# Altium PCB Dashboard.PcbDoc
Units mil, origin at the board's own origin, x right, y up, seen from the top; angles counter-clockwise.
Board outline 6291 x 3582 mil, 2 copper layers (Top Layer, Bottom Layer); 111 components, 163 nets, 496 pads, 0 vias.
Unrouted connection lines stored in the file: 231.
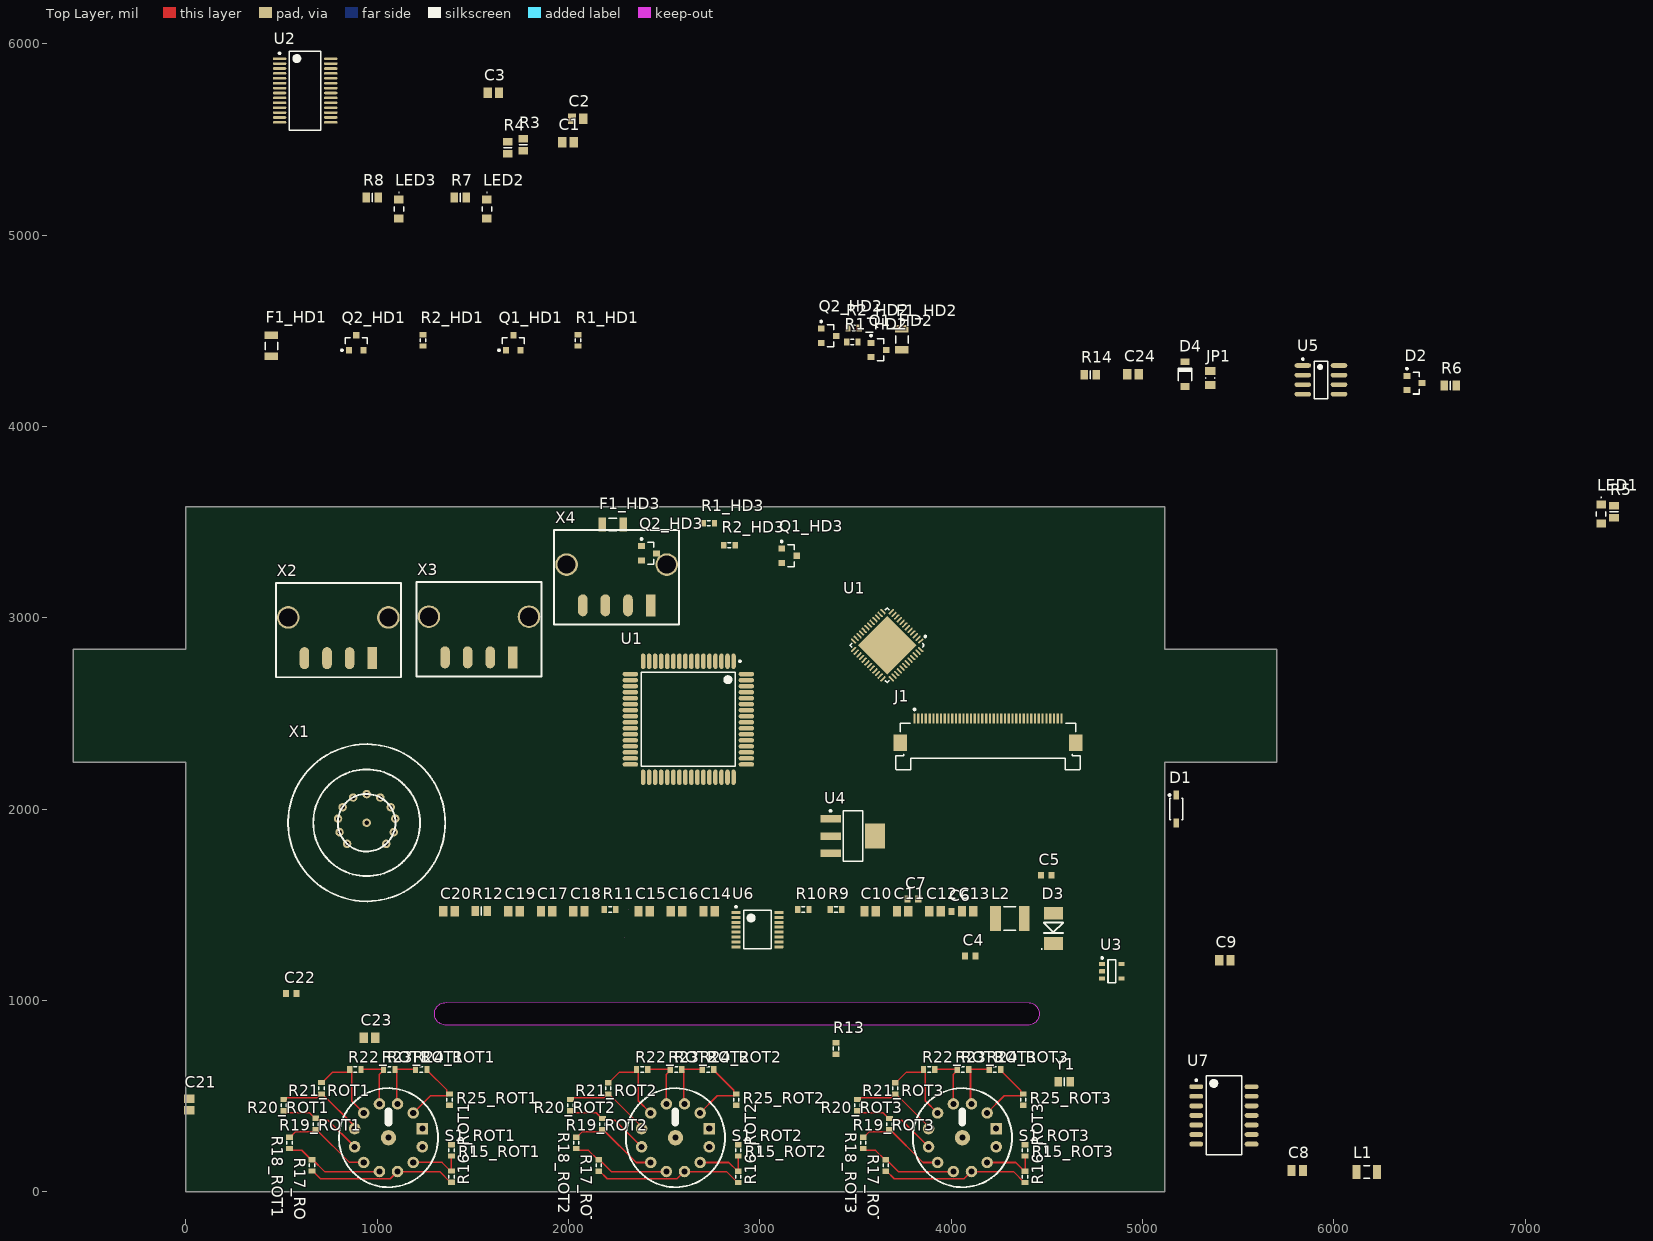
[diagram p0: Top Layer view]
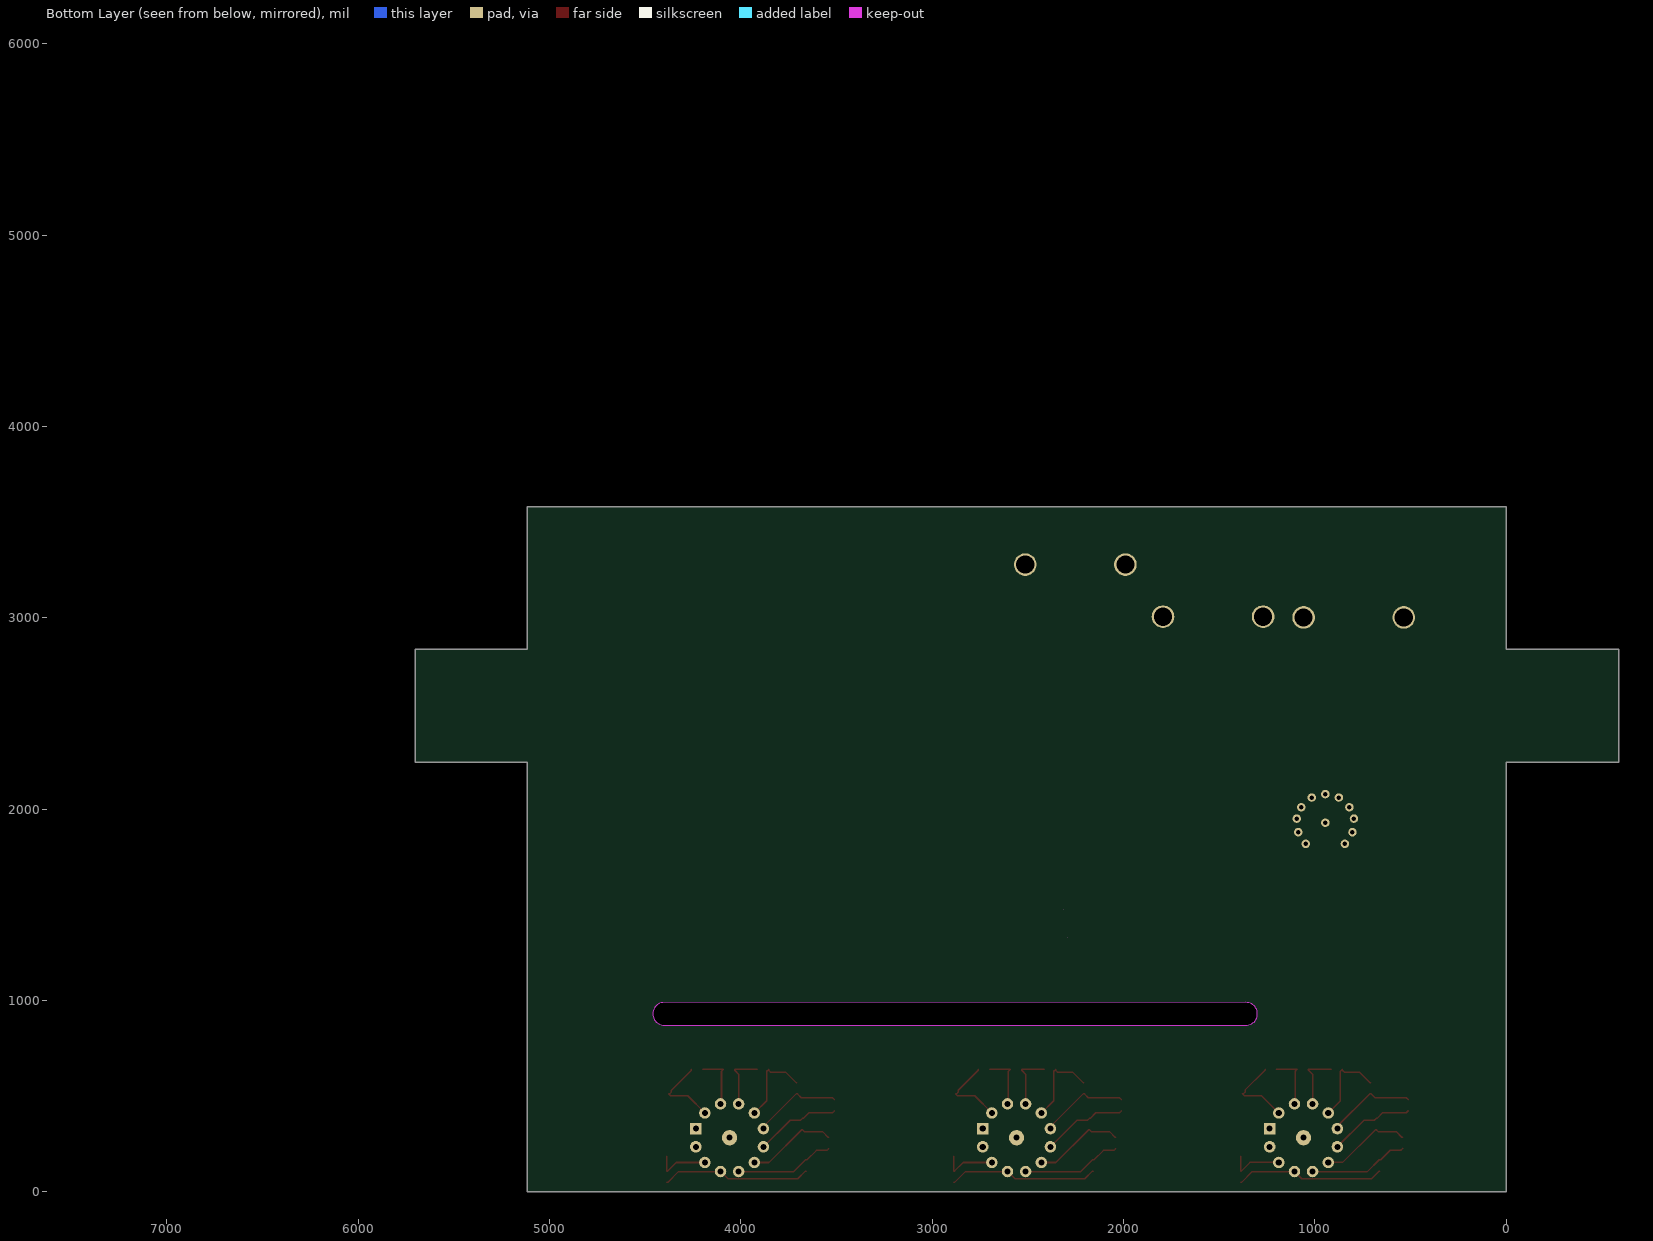
[diagram p1: Bottom Layer view, seen from below]

## Layer stack, top to bottom
Top Solder: solder mask 0.4, Solder Resist, Dk 3.5
Top Layer: signal copper 1.4
Dielectric 1: dielectric 12.6, FR-4, Dk 4.8
Bottom Layer: signal copper 1.4
Bottom Solder: solder mask 0.4, Solder Resist, Dk 3.5

## Board outline
0,0 0,2244.1 -590,2244.09 -590,2835 0,2835 0,3582 5118,3582 5118,2835 5701,2835 5701,2244.09 5118,2244.09 5118,0
cut-out: 1360,990 cw(c4400,930) 4460,930 cw(c4400,930) 4400,870 1360,870 cw(c1360,930) 1300,930 cw(c1360,930)
cut-out: 2312.99,1474.41
cut-out: 2291.34,1328.74

## Design rules (kind name [scope] priority, off if disabled: settings)
Clearance [All] p1: gap=4 ignorepadtopadclearanceinfootprint=FALSE except(0: Arc-Hole Track-Hole SMDPad-Hole THPad-Hole Via-Hole Fill-Hole Poly-Hole Region-Hole Text-Hole)
DiffPairsRouting [All] p1: maxlimit=10 minlimit=10 mostfreqgap=10 toplayer_minwidth=15 toplayer_maxwidth=15 toplayer_prefwidth=15 bottomlayer_minwidth=15 bottomlayer_maxwidth=15 bottomlayer_prefwidth=15 maxuncoupledlength=500
MatchedLengths "Schematic Matched Net Lengths" [InNet('CAN0.CAN_P')] p1: tolerance=1000 checknetsindiffpair=TRUE checkdiffpairvsdiffpair=FALSE checkxsignals=FALSE checkothers=FALSE
PolygonConnect [All] p1: connectstyle=Relief reliefconductorwidth=10 reliefentries=4 polygonreliefangle="90 Angle" airgapwidth=10
RoomDefinition ROT3 [InComponentClass('ROT3')] p1: confinementstyle=ConfineIn formatcopy=TRUE lockcomponents=FALSE outline 3471.46,-0.2 4426.18,-0.2 4426.18,678.94 3471.46,678.94
RoomDefinition ROT2 [InComponentClass('ROT2')] p2: confinementstyle=ConfineIn formatcopy=TRUE lockcomponents=FALSE outline 1971.46,-0.2 2926.18,-0.2 2926.18,678.94 1971.46,678.94
RoomDefinition ROT1 [InComponentClass('ROT1')] p3: confinementstyle=ConfineIn formatcopy=TRUE lockcomponents=FALSE outline 472.44,0 1427.17,0 1427.17,679.13 472.44,679.13
RoomDefinition "Boost Converter" [InComponentClass('Boost Converter')] p4: confinementstyle=ConfineIn formatcopy=TRUE lockcomponents=FALSE outline 1312.52,1250.35 4800.88,1250.35 4800.88,1604.7 1312.52,1604.7
RoomDefinition AT90 [InComponentClass('AT90')] p5: confinementstyle=ConfineIn formatcopy=TRUE lockcomponents=FALSE outline 5746.39,56.15 6259.21,56.15 6259.21,1093.61 5746.39,1093.61
RoomDefinition ResetCkt [InComponentClass('ResetCkt')] p6: confinementstyle=ConfineIn formatcopy=TRUE lockcomponents=FALSE outline 4597.79,4076.72 5437.35,4076.72 5437.35,4520.61 4597.79,4520.61
RoomDefinition PowerLed [InComponentClass('PowerLed')] p7: confinementstyle=ConfineIn formatcopy=TRUE lockcomponents=FALSE outline 7028.54,3054.13 7909.45,3054.13 7909.45,4054.13 7028.54,4054.13
RoomDefinition CAN [InComponentClass('CAN')] p8: confinementstyle=ConfineIn formatcopy=TRUE lockcomponents=FALSE outline 5688.93,3842.92 6706.64,3842.92 6706.64,4521.07 5688.93,4521.07
RoomDefinition Int [InComponentClass('Int')] p9: confinementstyle=ConfineIn formatcopy=TRUE lockcomponents=FALSE outline 303.15,4937.01 2226.93,4937.01 2226.93,6116.46 303.15,6116.46
RoomDefinition HD2 [InComponentClass('HD2')] p10: confinementstyle=ConfineIn formatcopy=TRUE lockcomponents=FALSE outline 2668.23,3676.18 4228.35,3676.18 4228.35,4676.18 2668.23,4676.18
RoomDefinition HD1 [InComponentClass('HD1')] p11: confinementstyle=ConfineIn formatcopy=TRUE lockcomponents=FALSE outline 160.43,3626.97 2160.43,3626.97 2160.43,4626.97 160.43,4626.97
RoomDefinition HD3 [InComponentClass('HD3')] p12: confinementstyle=ConfineIn formatcopy=TRUE lockcomponents=FALSE outline 1898.54,2648.62 3458.66,2648.62 3458.66,3648.62 1898.54,3648.62
RoutingVias [All] p1: holewidth=28 width=50 viastyle="Through Hole" minholewidth=28 minwidth=50 maxholewidth=28 maxwidth=50
SolderMaskExpansion [All] p1: expansion=4
Width [All] p1: maxlimit=10 minlimit=6 preferedwidth=8 minimp=50.000000 maximp=50.000000 favimp=50.000000
29 further rules are at their usual default settings.

## Classes and differential pairs
net class POS[1..3]: POS1 POS2 POS3
channel class Rotary_Pot: ROT1 ROT2 ROT3
component class ROT3: R15_ROT3 R16_ROT3 R17_ROT3 R18_ROT3 R19_ROT3 R20_ROT3 R21_ROT3 R22_ROT3 R23_ROT3 R24_ROT3 R25_ROT3 S1_ROT3
component class ROT2: R15_ROT2 R16_ROT2 R17_ROT2 R18_ROT2 R19_ROT2 R20_ROT2 R21_ROT2 R22_ROT2 R23_ROT2 R24_ROT2 R25_ROT2 S1_ROT2
component class ROT1: R15_ROT1 R16_ROT1 R17_ROT1 R18_ROT1 R19_ROT1 R20_ROT1 R21_ROT1 R22_ROT1 R23_ROT1 R24_ROT1 R25_ROT1 S1_ROT1
net class DRV[1..3]: DRV1 DRV2 DRV3
net class PWM[1..3]: PWM1 PWM2 PWM3
component class ResetCkt: C24 D4 JP1 R14
component class "Boost Converter": C10 C11 C12 C13 C14 C15 C16 C17 C18 C19 C20 D3 L2 R9 R10 R11 R12 U6
component class AT90: C8 C9 L1 U1 Y1
component class PowerLed: LED1 R5
component class CAN: D2 R6 U5
component class LCD: C21 C22 C23 J1 R13 U1 U7
component class Int: C1 C2 C3 LED2 LED3 R3 R4 R7 R8 U2
component class Dashboard: C4 C5 C6 C7 C? D1 D? U1 U3 U4 U? X1 X2 X3 X4 X?
component class HD1: F1_HD1 F1_HD13 Q1_HD1 Q1_HD13 Q2_HD1 Q2_HD13 R1_HD1 R1_HD13 R2_HD1 R2_HD13
channel class HighSideDriver: HD2 HD3
component class HD3: F1_HD3 Q1_HD3 Q2_HD3 R1_HD3 R2_HD3
component class HD2: F1_HD2 Q1_HD2 Q2_HD2 R1_HD2 R2_HD2
differential pair CAN0.CAN: +CAN0.CAN_P -CAN0.CAN_N

## Components (designator, comment, footprint, x,y, rotation, side; value= is the part's Value field where it differs from the comment)
C1 "Cap" C0805 1997.36,5485.07 r0 top value=0.1uF
C2 "Cap" C0805 2047.68,5608.27 r0 top value=0.1uF
C3 "Cap" C0805 1607.6,5744.91 r0 top value=0.1uF
C4 "Cap" 1608[0603] 4100.13,1232.12 r0 top value=1uF
C5 "Cap" 1608[0603] 4497.36,1654.36 r0 top value=1uF
C6 "Cap" 1608[0603] 4030.72,1465.82 r0 top value=10uF
C7 "Cap" 1608[0603] 3800.72,1530.82 r0 top value=10uF
C8 "Cap" C0805 5809.39,111.27 r0 top value=18pf
C9 "Cap" C0805 5431.1,1210.63 r0 top value=18pf
C10 "Cap" C0805 3576.41,1465.91 r0 top
C11 "Cap" C0805 3746.69,1465.91 r0 top
C12 "Cap" C0805 3915.99,1465.91 r0 top
C13 "Cap" C0805 4086.27,1465.91 r0 top
C14 "Cap" C0805 2734.83,1465.91 r0 top
C15 "Cap" C0805 2395.25,1465.91 r0 top
C16 "Cap" C0805 2564.55,1465.91 r0 top
C17 "Cap" C0805 1885.38,1465.91 r0 top
C18 "Cap" C0805 2054.68,1465.91 r0 top
C19 "Cap" C0805 1715.1,1465.91 r0 top
C20 "Cap" C0805 1375.51,1465.91 r0 top
C21 "Cap" C0805 16.84,456.35 r90 top value=4.7uF
C22 "Cap" 1608[0603] 551.84,1036.35 r0 top value=10uF
C23 "Cap" C0805 959.65,805.12 r0 top value=100nF
C24 "Cap" C0805 4950.79,4273.69 r0 top value=0.1uF
D1 "1N5819HW-7-F" DIOD-SOD-123-2_V 5177.17,2001.05 r90 top
D2 "NUP2105LT1" ONSC-SOT-23-3-318-08_V 6422.2,4227.77 r0 top
D3 "Schottky Diode" DIOM4326X24N 4535.11,1377.32 r90 top
D4 "1N4148W-TP" MCC-SOD123_V 5223.43,4274.15 r90 top
F1_HD1 "1206L016WR" LFUS-1206L016WR_V 446.58,4421.66 r90 top (schematic designator F1)
F1_HD2 "1206L016WR" LFUS-1206L016WR_V 3743.11,4455.71 r270 top (schematic designator F1)
F1_HD3 "1206L016WR" LFUS-1206L016WR_V 2231.3,3488.19 r0 top (schematic designator F1)
J1 "FH12A-40S-0.5SH(55)" HIRO-FH12A-40S-0.5SH(55)_V 4192.91,2410.43 r0 top
JP1 "Jumper 0805(2012)" RESC0805(2012)_N 5353.43,4254.15 r90 top value="0.00 Ohm"
L1 "10uH" INDC3216 6172.59,103.4 r0 top
L2 "Inductor" INDC4532 4306.76,1428.51 r0 top value=15uH
LED1 "LTST-C171AKT" LTST-C171AKT_V 7397.8,3542.98 r90 top
LED2 "LTST-C171AKT" LTST-C171AKT_V 1573.39,5137.24 r90 top
LED3 "LTST-C171AKT" LTST-C171AKT_V 1113.39,5137.24 r90 top
Q1_HD1 "MMBT4403LT1G" ONSC-SOT-23-3-318-08_V 1711.4,4438.39 r90 top (schematic designator Q1)
Q1_HD2 "MMBT4403LT1G" ONSC-SOT-23-3-318-08_V 3621.06,4400.59 r0 top (schematic designator Q1)
Q1_HD3 "MMBT4403LT1G" ONSC-SOT-23-3-318-08_V 3153.54,3324.8 r0 top (schematic designator Q1)
Q2_HD1 "MMBT4401M3T5G" ONSC-SOT-23-3-318-08_V 890.5,4438.39 r90 top (schematic designator Q2)
Q2_HD2 "MMBT4401M3T5G" ONSC-SOT-23-3-318-08_V 3360.24,4474.41 r0 top (schematic designator Q2)
Q2_HD3 "MMBT4401M3T5G" ONSC-SOT-23-3-318-08_V 2421.26,3337.6 r0 top (schematic designator Q2)
R1_HD1 "Res1" J1-0603 2050,4451.19 r90 top value=1K (schematic designator R1)
R1_HD2 "Res1" J1-0603 3484.25,4441.93 r0 top value=1K (schematic designator R1)
R1_HD3 "Res1" J1-0603 2733.27,3494.09 r0 top value=1K (schematic designator R1)
R2_HD1 "Res1" J1-0603 1239.92,4451.19 r90 top value=1K (schematic designator R2)
R2_HD2 "Res1" J1-0603 3490.16,4515.75 r180 top value=1K (schematic designator R2)
R2_HD3 "Res1" J1-0603 2841.54,3379.92 r0 top value=1K (schematic designator R2)
R3 "Res1" 6-0805_L 1763.15,5473.27 r90 top value=1K
R4 "Res1" 6-0805_L 1682.68,5458.27 r90 top value=1K
R5 "Res1" 6-0805_L 7465.55,3555.12 r90 top value=1k
R6 "Res1" 6-0805_L 6609.2,4213.99 r0 top value=100k
R7 "Res1" 6-0805_L 1433.39,5197.24 r0 top value=1k
R8 "Res1" 6-0805_L 973.39,5197.24 r0 top value=1k
R9 "Res3" J1-0603 3398.25,1475.75 r0 top value=10
R10 "Res3" J1-0603 3227.96,1475.75 r0 top value=182K
R11 "Res3" J1-0603 2217.09,1475.75 r0 top value=10K
R12 "Res3" 6-0805_L 1544.81,1467.88 r0 top value=12.7k
R13 "Res3" J1-0603 3397.64,749.02 r90 top value=47k
R14 "Res1" 6-0805_L 4727.71,4270.61 r0 top value=1K
R15_ROT1 "Res3" J1-0603 1387.8,216.54 r270 top value=1K (schematic designator R15)
R15_ROT2 "Res3" J1-0603 2886.81,216.34 r270 top value=1K (schematic designator R15)
R15_ROT3 "Res3" J1-0603 4386.81,216.34 r270 top value=1K (schematic designator R15)
R16_ROT1 "Res3" J1-0603 1387.8,78.74 r90 top value=1K (schematic designator R16)
R16_ROT2 "Res3" J1-0603 2886.81,78.54 r90 top value=1K (schematic designator R16)
R16_ROT3 "Res3" J1-0603 4386.81,78.54 r90 top value=1K (schematic designator R16)
R17_ROT1 "Res3" J1-0603 659.45,137.8 r90 top value=1K (schematic designator R17)
R17_ROT2 "Res3" J1-0603 2158.46,137.6 r90 top value=1K (schematic designator R17)
R17_ROT3 "Res3" J1-0603 3658.46,137.6 r90 top value=1K (schematic designator R17)
R18_ROT1 "Res3" J1-0603 541.34,255.91 r270 top value=1K (schematic designator R18)
R18_ROT2 "Res3" J1-0603 2040.35,255.71 r270 top value=1K (schematic designator R18)
R18_ROT3 "Res3" J1-0603 3540.35,255.71 r270 top value=1K (schematic designator R18)
R19_ROT1 "Res3" J1-0603 679.13,354.33 r90 top value=1K (schematic designator R19)
R19_ROT2 "Res3" J1-0603 2178.15,354.13 r90 top value=1K (schematic designator R19)
R19_ROT3 "Res3" J1-0603 3678.15,354.13 r90 top value=1K (schematic designator R19)
R20_ROT1 "Res3" J1-0603 511.81,452.76 r270 top value=1K (schematic designator R20)
R20_ROT2 "Res3" J1-0603 2010.83,452.56 r270 top value=1K (schematic designator R20)
R20_ROT3 "Res3" J1-0603 3510.83,452.56 r270 top value=1K (schematic designator R20)
R21_ROT1 "Res3" J1-0603 708.66,541.34 r90 top value=1K (schematic designator R21)
R21_ROT2 "Res3" J1-0603 2207.68,541.14 r90 top value=1K (schematic designator R21)
R21_ROT3 "Res3" J1-0603 3707.68,541.14 r90 top value=1K (schematic designator R21)
R22_ROT1 "Res3" J1-0603 885.83,639.76 r180 top value=1K (schematic designator R22)
R22_ROT2 "Res3" J1-0603 2384.84,639.57 r180 top value=1K (schematic designator R22)
R22_ROT3 "Res3" J1-0603 3884.84,639.57 r180 top value=1K (schematic designator R22)
R23_ROT1 "Res3" J1-0603 1062.99,639.76 r0 top value=1K (schematic designator R23)
R23_ROT2 "Res3" J1-0603 2562.01,639.57 r0 top value=1K (schematic designator R23)
R23_ROT3 "Res3" J1-0603 4062.01,639.57 r0 top value=1K (schematic designator R23)
R24_ROT1 "Res3" J1-0603 1230.32,639.76 r180 top value=1K (schematic designator R24)
R24_ROT2 "Res3" J1-0603 2729.33,639.57 r180 top value=1K (schematic designator R24)
R24_ROT3 "Res3" J1-0603 4229.33,639.57 r180 top value=1K (schematic designator R24)
R25_ROT1 "Res3" J1-0603 1377.95,482.28 r270 top value=1K (schematic designator R25)
R25_ROT2 "Res3" J1-0603 2876.97,482.09 r270 top value=1K (schematic designator R25)
R25_ROT3 "Res3" J1-0603 4376.97,482.09 r270 top value=1K (schematic designator R25)
S1_ROT1 "Rotary" Rotary 1059.06,282.68 r0 top (schematic designator S1)
S1_ROT2 "Rotary" Rotary 2559.05,282.68 r0 top (schematic designator S1)
S1_ROT3 "Rotary" Rotary 4059.05,282.68 r0 top (schematic designator S1)
U1 "FT801Q-R" WQFN-48 3665.69,2856.89 r225 top
U1 "AT90CAN128-16AU" 64A_M 2626.44,2470.03 r270 top
U2 "FT232RL-Reel" SSOP-28_L 623.39,5756.46 r0 top
U3 "LP5907MFX-3.3/NOPB" DBV0005A_L 4839.8,1152.6 r0 top
U4 "LM1117IMPX-5.0/NOPB" MP04A_M 3486.14,1859.45 r0 top
U5 "MCP2551-I/SN" SOIC-SN8_N 5933.07,4244.29 r0 top
U6 "LM5000-3MTC/NOPB" PW0016A_L 2987.8,1370.43 r0 top
U7 "74LCS125M" SOIC127P780X210-14M 5426.06,399.29 r0 top
X1 "EN3P12MX" EN3P12MX 944.88,1929.13 r0 top
X2 "043650-0409" 043650-0409 795,3002 r0 top
X3 "043650-0409" 043650-0409 1530,3006 r0 top
X4 "043650-0409" 043650-0409 2250,3278 r0 top
Y1 "XTAL" 6-0805_L 4591.85,575.62 r0 top

## Footprints (in the part's own frame and the unit in brackets; to place one, negate y for a bottom-side part, rotate by r counter-clockwise, add the part's x,y. Pads: shape width x height; smd on the part's side, far side on the other; paste and mask are expansions set on the pad)
6-0805_L [mm] "Chip Resistor, Body 2.0x1.2mm, IPC High Density"
  rect 1x1.3 smd: 1(-0.8,0) 2(0.8,0)
  silkscreen extent 0,-0.55 0,0.55, body extent -1.07,-0.7 1.07,0.7, height 0.7
64A_M [mm] "Thin QFP, 64-Leads, Body 14x14mm, Pitch 0.8mm, IPC Low Density"
  oval 2.05x0.6 smd: 1(-7.7,6) 2(-7.7,5.2) 3(-7.7,4.4) 4(-7.7,3.6) 5(-7.7,2.8) 6(-7.7,2) 7(-7.7,1.2) 8(-7.7,0.4) 9(-7.7,-0.4) 10(-7.7,-1.2) 11(-7.7,-2) 12(-7.7,-2.8) 13(-7.7,-3.6) 14(-7.7,-4.4) 15(-7.7,-5.2) 16(-7.7,-6) 33(7.7,-6) 34(7.7,-5.2) 35(7.7,-4.4) 36(7.7,-3.6) 37(7.7,-2.8) 38(7.7,-2) 39(7.7,-1.2) 40(7.7,-0.4) 41(7.7,0.4) 42(7.7,1.2) 43(7.7,2) 44(7.7,2.8) 45(7.7,3.6) 46(7.7,4.4) 47(7.7,5.2) 48(7.7,6)
  oval 0.6x2.05 smd: 17(-6,-7.7) 18(-5.2,-7.7) 19(-4.4,-7.7) 20(-3.6,-7.7) 21(-2.8,-7.7) 22(-2,-7.7) 23(-1.2,-7.7) 24(-0.4,-7.7) 25(0.4,-7.7) 26(1.2,-7.7) 27(2,-7.7) 28(2.8,-7.7) 29(3.6,-7.7) 30(4.4,-7.7) 31(5.2,-7.7) 32(6,-7.7) 49(6,7.7) 50(5.2,7.7) 51(4.4,7.7) 52(3.6,7.7) 53(2.8,7.7) 54(2,7.7) 55(1.2,7.7) 56(0.4,7.7) 57(-0.4,7.7) 58(-1.2,7.7) 59(-2,7.7) 60(-2.8,7.7) 61(-3.6,7.7) 62(-4.4,7.7) 63(-5.2,7.7) 64(-6,7.7)
  silkscreen extent -7.82,-6.25 6.25,6.98, body extent -7,-7 7,7, height 1.6
1608[0603] [mm] "Chip Capacitor, Body 1.6x0.8mm, IPC High Density"
  rect 0.8x0.9 smd: 1(-0.7,0) 2(0.7,0)
  body extent -0.87,-0.48 0.87,0.48, height 1.3
043650-0409 [mm]
  rect 1.27x2.92 smd: 1(4.546,-5.398)
  oval 1.27x2.92 smd: 2(1.546,-5.398) 3(-1.454,-5.398) 4(-4.454,-5.398)
  round 3 hole 2.41: H1(-6.604,0.008) H2(6.696,0.008)
  silkscreen extent -8.26,-7.94 8.35,4.61, body extent -7.82,-6.29 7.82,4.45, height 5.58
C0805 [mm] "Chip Capacitor, Body 2.0x1.3mm, IPC High Density"
  rect 1.1x1.4 smd: 1(-0.75,0) 2(0.75,0)
  body extent -1.1,-0.72 1.1,0.72, height 1.4
DBV0005A_L [mm] "SOT23, 5-Leads, Body 3.05x1.75mm, Pitch 0.95mm, IPC High Density"
  rrect18% 0.8x0.55 smd: 1(-1.275,0.95) 2(-1.275,0) 3(-1.275,-0.95) 4(1.275,-0.95) 5(1.275,0.95)
  silkscreen extent -1.4,-1.55 0.5,1.9, body extent -1.42,-1.46 1.42,1.46, height 1.08
DIOD-SOD-123-2_V [mm] "SOD-123, 2-Leads, Body 2.85x1.7mm (max), Pitch 3.7mm"
  rect 1.2x0.7 smd: 1(-1.85,0) 2(1.85,0)
  silkscreen extent -1.42,-0.85 1.97,1.02, body extent -1.42,-0.85 1.43,0.85, height 1.45
DIOM4326X24N [mm] "Molded Diode, 2-Leads, Body 4.30x2.61mm, IPC Medium Density"
  rect 1.7x2.5 smd: 1(-2,0) 2(2,0)
  silkscreen extent -2.8,-1.27 0.76,1.6, body extent -2.3,-1.46 2.3,1.46, height 2.4
EN3P12MX [mm] "Switchcraft Connector"
  round 1.127 hole 0.6: 1(0,0) 2(2.6,-2.8) 3(3.6,-1.25) 4(3.8,0.55) 5(3.2,2.05) 6(1.8,3.35) 7(0,3.8) 8(-1.8,3.35) 9(-3.2,2.05) 10(-3.8,0.55) 11(-3.6,-1.25) 12(-2.6,-2.8)
  silkscreen extent -10.43,-10.43 10.43,10.43, body extent -10.31,-10.31 10.31,10.31, height 21.01
HIRO-FH12A-40S-0.5SH(55)_V [mm] "SMD, 40-Leads, Body 24.5x6.2mm, Pitch 0.5mm"
  rect 0.3x1.3 smd paste-0.025: 1(-9.75,1.625) 2(-9.25,1.625) 3(-8.75,1.625) 4(-8.25,1.625) 5(-7.75,1.625) 6(-7.25,1.625) 7(-6.75,1.625) 8(-6.25,1.625) 9(-5.75,1.625) 10(-5.25,1.625) 11(-4.75,1.625) 12(-4.25,1.625) 13(-3.75,1.625) 14(-3.25,1.625) 15(-2.75,1.625) 16(-2.25,1.625) 17(-1.75,1.625) 18(-1.25,1.625) 19(-0.75,1.625) 20(-0.25,1.625) 21(0.25,1.625) 22(0.75,1.625) 23(1.25,1.625) 24(1.75,1.625) 25(2.25,1.625) 26(2.75,1.625) 27(3.25,1.625) 28(3.75,1.625) 29(4.25,1.625) 30(4.75,1.625) 31(5.25,1.625) 32(5.75,1.625) 33(6.25,1.625) 34(6.75,1.625) 35(7.25,1.625) 36(7.75,1.625) 37(8.25,1.625) 38(8.75,1.625) 39(9.25,1.625) 40(9.75,1.625)
  rect 1.8x2.2 smd: MP1(-11.65,-1.625) MP2(11.65,-1.625)
  silkscreen extent -12.25,-5.2 12.25,2.95, body extent -12.25,-5.2 12.25,1.8, height 2.15
INDC3216 [mm] "Chip Inductor, Body 3.2x1.6mm, IPC High Density"
  rect 1.1x1.8 smd: 1(-1.35,0) 2(1.35,0)
  silkscreen extent -0.4,-0.8 0.4,0.8, body extent -1.7,-0.9 1.7,0.9, height 0.55
INDC4532 [mm] "Chip Inductor, Body 4.5x3.2mm, IPC High Density"
  rect 1.4x3.3 smd: 1(-1.9,0) 2(1.9,0)
  silkscreen extent -0.8,-1.55 0.8,1.55, body extent -2.4,-1.7 2.4,1.7, height 0.55
J1-0603 [mm] "Chip Resistor, Body 1.6x0.8mm, IPC High Density"
  rect 0.7x0.9 smd: 1(-0.75,0) 2(0.75,0)
  silkscreen extent -0.2,-0.35 0.2,0.35, body extent -0.85,-0.48 0.85,0.48, height 0.9
LFUS-1206L016WR_V [mm] "SMD, 2-Leads, Body 3.2x1.65mm, Height 1.45mm (Max)"
  rect 1x1.8 smd: 1(-1.4,0) 2(1.4,0)
  silkscreen extent -0.5,-0.82 0.5,0.82, body extent -1.6,-0.82 1.6,0.82, height 1.45
LTST-C171AKT_V [mm] "SMD, 2-Leads, Body 2x1.25mm"
  rect 1.1x1.25 smd: 1(-1.25,0) 2(1.25,0)
  silkscreen extent -0.3,-0.62 2.25,0.62, body extent -1,-0.63 1,0.63, height 0.8
MCC-SOD123_V [mil] "SOD123, 2-Leads, Body 2.7x1.6mm, Height 1.35mm"
  rect 35.98x47.99 smd: 1(-64.5,0) 2(64.5,0)
  silkscreen extent -36,-35 31,35, body extent -53,-31 53,31, height 53
MP04A_M [mm] "SOT223, 4-Leads, Body 6.5x3.5mm, Pitch 2.3mm, Lead Span 7mm, IPC Low Density"
  rect 2.7x1 smd: 1(-2.95,2.3) 2(-2.95,0) 3(-2.95,-2.3)
  rect 2.7x3.3 smd: 4(2.95,0)
  silkscreen extent -3.07,-3.35 1.3,3.47, body extent -1.86,-3.35 1.86,3.35, height 1.8
ONSC-SOT-23-3-318-08_V [mm] "SOT23, 3-Leads, Body 2.92x1.3mm, Pitch 0.95mm"
  rect 0.9x0.8 smd: 1(-1,0.95) 2(-1,-0.95) 3(1,0)
  silkscreen extent -1.12,-1.46 0.65,2.02, body extent -0.65,-1.46 0.65,1.46, height 1.11
PW0016A_L [mm] "SOP, 16-Leads, Body 5.1x4.5mm, Pitch 0.65mm, IPC High Density"
  rrect25% 1.2x0.4 smd: 1(-2.85,2.275) 2(-2.85,1.625) 3(-2.85,0.975) 4(-2.85,0.325) 5(-2.85,-0.325) 6(-2.85,-0.975) 7(-2.85,-1.625) 8(-2.85,-2.275) 9(2.85,-2.275) 10(2.85,-1.625) 11(2.85,-0.975) 12(2.85,-0.325) 13(2.85,0.325) 14(2.85,0.975) 15(2.85,1.625) 16(2.85,2.275)
  silkscreen extent -2.97,-2.55 1.85,3.15, body extent -3.21,-2.5 3.21,2.5, height 1
RESC0805(2012)_N [mm] "Chip Resistor, Body 2.0x1.3mm, IPC Medium Density"
  rect 1.05x1.4 smd: 1(-0.95,0) 2(0.95,0)
  silkscreen extent -0.05,-0.6 0.05,0.6, body extent -1.1,-0.67 1.1,0.68, height 0.7
Rotary [mil]
  round 60 hole 31.5: 1(176.73,-47.36) 2(129.37,-129.37) 3(47.36,-176.77) 4(-47.36,-176.77) 5(-129.37,-129.37) 6(-176.77,-47.36) 7(-176.73,47.36) 8(-129.37,129.37) 9(-47.36,176.73) 10(47.36,176.73) 11(129.37,129.37)
  rect 60x60 hole 31.5: 12(176.73,47.36)
  round 80 hole 31.5: 13(0,0)
  silkscreen extent -259,-259 259,259, body extent -250,-250 250,250, height 965
SOIC127P780X210-14M [mm] "SOIC, 14-Leads, Body 10.30x5.25mm, Pitch 1.27mm, IPC Low Density"
  oval 1.85x0.65 smd: 1(-3.675,3.81) 2(-3.675,2.54) 3(-3.675,1.27) 4(-3.675,0) 5(-3.675,-1.27) 6(-3.675,-2.54) 7(-3.675,-3.81) 8(3.675,-3.81) 9(3.675,-2.54) 10(3.675,-1.27) 11(3.675,0) 12(3.675,1.27) 13(3.675,2.54) 14(3.675,3.81)
  silkscreen extent -3.8,-5.25 2.35,5.25, body extent -2.75,-5.25 2.75,5.25, height 2.1
SOIC-SN8_N [mm] "SOIC, 8-Leads, Body 4.9x3.9mm, Pitch 1.27mm, IPC Medium Density"
  oval 2.2x0.6 smd: 1(-2.4,1.905) 2(-2.4,0.635) 3(-2.4,-0.635) 4(-2.4,-1.905) 5(2.4,-1.905) 6(2.4,-0.635) 7(2.4,0.635) 8(2.4,1.905)
  silkscreen extent -2.52,-2.5 0.9,2.88, body extent -2,-2.5 2,2.5, height 1.75
SSOP-28_L [mm] "SOP, 28-Leads, Body 10.2x5.3mm, Pitch 0.65mm, IPC High Density"
  oval 1.8x0.35 smd: 1(-3.4,4.225) 2(-3.4,3.575) 3(-3.4,2.925) 4(-3.4,2.275) 5(-3.4,1.625) 6(-3.4,0.975) 7(-3.4,0.325) 8(-3.4,-0.325) 9(-3.4,-0.975) 10(-3.4,-1.625) 11(-3.4,-2.275) 12(-3.4,-2.925) 13(-3.4,-3.575) 14(-3.4,-4.225) 15(3.4,-4.225) 16(3.4,-3.575) 17(3.4,-2.925) 18(3.4,-2.275) 19(3.4,-1.625) 20(3.4,-0.975) 21(3.4,-0.325) 22(3.4,0.325) 23(3.4,0.975) 24(3.4,1.625) 25(3.4,2.275) 26(3.4,2.925) 27(3.4,3.575) 28(3.4,4.225)
  silkscreen extent -3.52,-5.25 2.1,5.25, body extent -2.8,-5.25 2.8,5.25, height 2
WQFN-48 [mm] "WQFN, 48-Leads, Body 7.0x7.0mm, Pitch 0.50mm"
  oct 0.9x0.25 smd: 1(-3.55,2.75)
  oval 0.9x0.25 smd: 2(-3.55,2.25) 3(-3.55,1.75) 4(-3.55,1.25) 5(-3.55,0.75) 6(-3.55,0.25) 7(-3.55,-0.25) 8(-3.55,-0.75) 9(-3.55,-1.25) 10(-3.55,-1.75) 11(-3.55,-2.25) 12(-3.55,-2.75) 25(3.55,-2.75) 26(3.55,-2.25) 27(3.55,-1.75) 28(3.55,-1.25) 29(3.55,-0.75) 30(3.55,-0.25) 31(3.55,0.25) 32(3.55,0.75) 33(3.55,1.25) 34(3.55,1.75) 35(3.55,2.25) 36(3.55,2.75)
  oval 0.25x0.9 smd: 13(-2.75,-3.55) 14(-2.25,-3.55) 15(-1.75,-3.55) 16(-1.25,-3.55) 17(-0.75,-3.55) 18(-0.25,-3.55) 19(0.25,-3.55) 20(0.75,-3.55) 21(1.25,-3.55) 22(1.75,-3.55) 23(2.25,-3.55) 24(2.75,-3.55) 37(2.75,3.55) 38(2.25,3.55) 39(1.75,3.55) 40(1.25,3.55) 41(0.75,3.55) 42(0.25,3.55) 43(-0.25,3.55) 44(-0.75,3.55) 45(-1.25,3.55) 46(-1.75,3.55) 47(-2.25,3.55) 48(-2.75,3.55)
  rect 5.5x5.5 smd: 49(0,0)
  silkscreen extent -4.52,-3.5 3.5,3.5

## Part data
C1 C2 C3 C4 C5 C6 C7 C8 C9 C10 C11 C12 C13 C14 C15 C16 C17 C18 C19 C20 C21 C22 C23 C24: "Capacitor", LatestRevisionDate=17-Jul-2002, LatestRevisionNote="Re-released for DXP Platform.", PackageReference=RAD-0.3, Published=8-Jun-2000, Publisher="Altium Limited"
  C1 C2 C3 C4 C5 C6 C7 C21 C22 C23: PackageDescription="Radial Cap, Thru-Hole; 2 Leads; 0.3 in Pin Spacing"
  C8 C9 C24: PackageDescription=MLCC_0805
  C10 C11 C12 C13 C14: =4.7uF, PackageDescription="Radial Cap, Thru-Hole; 2 Leads; 0.3 in Pin Spacing"
  C15: =0.1uF, PackageDescription="Radial Cap, Thru-Hole; 2 Leads; 0.3 in Pin Spacing"
  C16: =10uF, PackageDescription="Radial Cap, Thru-Hole; 2 Leads; 0.3 in Pin Spacing"
  C17 C18: =3.3uF, PackageDescription="Radial Cap, Thru-Hole; 2 Leads; 0.3 in Pin Spacing"
  C19: =100pF, PackageDescription="Radial Cap, Thru-Hole; 2 Leads; 0.3 in Pin Spacing"
  C20: =0.15uF, PackageDescription="Radial Cap, Thru-Hole; 2 Leads; 0.3 in Pin Spacing"
D1: library part CMP-0303-00003-1, "1.0 A Surface Mount Schottky Barrier Rectifier, 40 V, -65 to 125 degC, 2-Pin SOD-123 Package, RoHS, Tape and Reel", @ Terminal Temperature TT (degC)=90, Forward Voltage Drop VF (V)=0.45, Manufacturer="Diodes Inc", Maximum Average Rectified Current IO (A)=1, Maximum Reverse Current IR (uA)=50, Operating and Storage Temperature Range="-65 to 125 degC", Peak Forward Surge Current IFSM (A)=25, Peak Repetitive Reverse Voltage VRRM (V)=40, @ IF (A)=1, @ VR (V)=40, ComponentLink1Description="Manufacturer URL", ComponentLink1URL=http://www.diodes.com/, ComponentLink2Description=Datasheet, ComponentLink2URL=http://www.diodes.com/datasheets/ds30217.pdf, DatasheetVersion="Rev. 15-2", Mounting Technology="Surface Mount", PackageDescription="2-Pin SOD-123, Body 2.7 x 1.55 mm, Pitch 3.7 mm", PackageReference=SOD-123-2, Packing="Tape and Reel", PartNumber=1N5819HW-7-F, RoHS=TRUE, Total Capacitance CT (pF)=50, VR (RMS) (V)=28
D2: library part CMP-1063-00165-1, "Dual Line CAN Bus Protector, 3-Pin SOT-23, Tape and Reel", Manufacturer="On Semiconductor", C Max (pF)=30, ComponentLink1Description="Manufacturer URL", ComponentLink1URL=http://www.onsemi.com/, ComponentLink2Description=Datasheet, ComponentLink2URL=http://www.onsemi.cn/pub_link/Collateral/NUP2105L-D.PDF, ComponentLink3Description="Package Specification", ComponentLink3URL=http://www.onsemi.cn/pub_link/Collateral/318-08.PDF, DatasheetVersion="Rev. 5", Direction=Bidirectional, IR Max (uA)=0.1, Mounting Technology="Surface Mount", Number of Lines=2, PackageDescription="3-Pin Small Outline Transistor, Body 2.92 x 1.3 mm, Pitch 0.95 mm", PackageReference=SOT-23-3-318-08, PackageVersion="Rev. AP, 11/2009", Packing="Tape and Reel", PartNumber=NUP2105LT1, PPK Max (W)=350, V(BR) Min (V)=26.2
D3: library part B160-13-F
D4: library part CMP-2000-04993-1, "High Speed Switching Diode, 400 mW, 150 mA, -65 to 150 degC, 2-Pin SOD123, RoHS, Tape and Reel", Average Forward Current-Max=0.15A, Manufacturer="Micro Commercial Components", Package Description="2-Pin Small Outline Diode, Body 2.7 x 1.6 mm, Height 1.35 mm", Package Reference=SOD123, Peak Current-Max=2A, Power Dissipation=400mW, Reverse Voltage-Max [Vrrm]=100V, Datasheet URL=https://datasheet.ciiva.com/16836/1n4148wsod123-16836277.pdf, Datasheet Version="Rev. C, 07/2014", Manufacturer URL=http://www.mccsemi.com/, Package URL=http://www.mccsemi.com/up_pdf/1N4448W(SOD-123).pdf, Reverse Recovery Time-Max=4ns
F1_HD1 F1_HD2 F1_HD3: library part CMP-2000-05471-1, "Resettable Fuse, 30 V, 100 A, 4.5 Ohm, -40 to 85 degC, 1206 (3216 Metric), RoHS, Tape and Reel", Hold Current [Ih]=0.16A, Manufacturer=Littelfuse, Operating Temp Range=-40to+85°C, Package Description="2-Pin Surface Mount Device, Body 3.2 x 1.65 mm, Height 1.45 mm (Max)", Trip Current=0.37A, Working Voltage-Max=30V, Datasheet URL=http://www.littelfuse.com/~/media/electronics/datasheets/resettable_ptcs/littelfuse_ptc_1206l_datasheet.pdf.pdf, Datasheet Version=08/2016, Manufacturer URL=http://www.littelfuse.com/, Mounting Technology=SurfaceMount, Package Reference=1206L016WR, Size=1206
J1: library part CMP-2000-06268-1, "Flip Lock Conncetor for FPC/FFC, 1 x 40 Position, Pitch 0.5 mm, -40 to 70 degC, SMD, RoHS, Tape and Reel", Manufacturer="Hirose Electric", Package Description="Female Header, Pitch 0.5 mm, 1 x 40 Position, Height 2 mm", Datasheet URL=https://datasheet.ciiva.com/14667/0900766b80806912-14667338.pdf, Datasheet Version=10/2006, Manufacturer URL=https://www.hirose.com, Mounting Technology=SurfaceMount, No of Positions=40, Package Reference=FH12A-40S-0.5SH(55), Pitch=0.5mm, Style/Orientation=RightAngleSocket/Receptacle, Termination=Solder, Type=FFC/FPC
JP1: library part CMP-1013-00001-1, "Jumper 0805 (2012 Metric)", Case-EIA=0805, Case-Metric=2012, Power=None, Technology=SMT, Tolerance=None
L1: library part Inductor, "Inductor", Code_IEC=1005, Code_JEITA=0402, LatestRevisionDate=29-May-2009, LatestRevisionNote="IPC-7351 Footprint Added.", PackageDescription="Chip Inductor", PackageReference=0402-A, Published=8-Jun-2000, Publisher="Altium Limited"
LED1 LED2 LED3: library part CMP-1674-00004-5, "LED Uni-Color Orange, 100 mW, 120 mA, -55 to 85 degC, 2-Pin SMD, RoHS, Tape and Reel", Colour=Orange, Manufacturer=Lite-On, Max Operating Temperature="85 degC", Min Operating Temperature="-55 degC", Package Quantity=3000, ComponentLink1Description="Manufacturer URL", ComponentLink1URL=http://www.us.liteon.com/, ComponentLink2Description=Datasheet, ComponentLink2URL=http://optoelectronics.liteon.com/upload/download/DS-22-99-0170/S_110_LTST-C171AKT.pdf, DatasheetVersion=03/2014, Height="0.8 mm", Length="2 mm", Mount="Surface Mount", Mounting Technology="Surface Mount", PackageDescription="2-Pin Surface Mount Device, Body 2 x 1.25 mm", PackageReference=C171AKT, Packaging="Tape and Reel", Pins=2, RoHSCompliant=true
Q1_HD1 Q1_HD2 Q1_HD3: library part CMP-1048-00539-1, "Switching Transistor, PNP Silicon, 3-Pin SOT-23, Pb-Free, Tape and Reel", Manufacturer="On Semiconductor", ComponentLink1Description="Manufacturer URL", ComponentLink1URL=http://www.onsemi.com/, ComponentLink2Description=Datasheet, ComponentLink2URL=http://www.onsemi.cn/pub_link/Collateral/MMBT4403LT1-D.PDF, ComponentLink3Description="Package Specification", ComponentLink3URL=http://www.onsemi.cn/pub_link/Collateral/318-08.PDF, DatasheetVersion="Rev. 12", fT Min (MHz)=200, IC Continuous (A)=-0.6, Mounting Technology="Surface Mount", PackageDescription="3-Pin Small Outline Transistor, Body 2.92 x 1.3 mm, Pitch 0.95 mm", PackageReference=SOT-23-3-318-08, PackageVersion="Rev. AP, 11/2009", Packing="Tape and Reel", PartNumber=MMBT4403LT1G, Polarity=PNP, RoHS=TRUE
Q2_HD1 Q2_HD2 Q2_HD3: library part CMP-1048-00548-1, "Switching Transistor, NPN Silicon, 3-Pin SOT-23, Pb-Free, Tape and Reel", Manufacturer="On Semiconductor", PartNumber=MMBT4401LT3G, ComponentLink1Description="Manufacturer URL", ComponentLink1URL=http://www.onsemi.com/, ComponentLink2Description=Datasheet, ComponentLink2URL=http://www.onsemi.cn/pub_link/Collateral/MMBT4401LT1-D.PDF, ComponentLink3Description="Package Specification", ComponentLink3URL=http://www.onsemi.cn/pub_link/Collateral/318-08.PDF, DatasheetVersion="Rev. 10", fT Min (MHz)=250, IC Continuous (A)=0.6, Mounting Technology="Surface Mount", PackageDescription="3-Pin Small Outline Transistor, Body 2.92 x 1.3 mm, Pitch 0.95 mm", PackageReference=SOT-23-3-318-08, PackageVersion="Rev. AP, 11/2009", Packing="Tape and Reel", Polarity=NPN, RoHS=TRUE
R1_HD1 R1_HD2 R1_HD3 R2_HD1 R2_HD2 R2_HD3 R3 R4 R5 R6 R7 R8 R9 R10 R11 R12 R13 R14 R15_ROT1 R15_ROT2 R15_ROT3 R16_ROT1 R16_ROT2 R16_ROT3 R17_ROT1 R17_ROT2 R17_ROT3 R18_ROT1 R18_ROT2 R18_ROT3 R19_ROT1 R19_ROT2 R19_ROT3 R20_ROT1 R20_ROT2 R20_ROT3 R21_ROT1 R21_ROT2 R21_ROT3 R22_ROT1 R22_ROT2 R22_ROT3 R23_ROT1 R23_ROT2 R23_ROT3 R24_ROT1 R24_ROT2 R24_ROT3 R25_ROT1 R25_ROT2 R25_ROT3: "Resistor", Published=8-Jun-2000, Publisher="Altium Limited"
  R1_HD1 R1_HD2 R1_HD3 R2_HD1 R2_HD2 R2_HD3 R3 R4 R5 R6 R7 R8 R14: LatestRevisionDate=17-Jul-2002, LatestRevisionNote="Re-released for DXP Platform.", PackageDescription="Axial Device, Thru-Hole; 2 Leads; 0.3 in Pin Spacing", PackageReference=AXIAL-0.3
  R9 R10 R11 R12 R13 R15_ROT1 R15_ROT2 R15_ROT3 R16_ROT1 R16_ROT2 R16_ROT3 R17_ROT1 R17_ROT2 R17_ROT3 R18_ROT1 R18_ROT2 R18_ROT3 R19_ROT1 R19_ROT2 R19_ROT3 R20_ROT1 R20_ROT2 R20_ROT3 R21_ROT1 R21_ROT2 R21_ROT3 R22_ROT1 R22_ROT2 R22_ROT3 R23_ROT1 R23_ROT2 R23_ROT3 R24_ROT1 R24_ROT2 R24_ROT3 R25_ROT1 R25_ROT2 R25_ROT3: LatestRevisionDate=29-May-2009, LatestRevisionNote="IPC-7351 Footprint Added.", PackageDescription="Chip Resistor", PackageReference=J1-0603
U1: library part CMP-0582-00009-1, "FT801 Single Chip Embedded Graphic Controller (Embedded Video Engine), -40 to +85 degC, 48-pin VQFN, Pb-Free, Tape and Reel", Manufacturer=FTDI, ComponentLink1Description="Manufacturer URL", ComponentLink1URL=http://www.ftdichip.com/, ComponentLink2Description=Datasheet, ComponentLink2URL=http://www.ftdichip.com/Support/Documents/DataSheets/ICs/DS_FT801.pdf, DatasheetVersion="ver 1.0, Jul-2014", PackageDescription="48-Pin Quad Flat No-Lead, 7 x 7 mm Body, 0.5 mm Pitch, 5.36 x 5.36 mm Exposed Pad", PackageReference=WQFN-48, PartId=2
U1: library part CMP-0096-00104-2, "8-bit AVR Microcontroller, 128KB Flash and CAN Controller, 53 GPIO pins, Industrial Grade (-40° to +85°C), 64-pin LQFP, Green", Code_JEDEC=MS-026-AEB, ComponentLink1Description="Manufacturer URL", ComponentLink1URL=http://www.atmel.com/, ComponentLink2Description="AT90CAN32/64/128 Datasheet", ComponentLink2URL=http://www.atmel.com/dyn/resources/prod_documents/doc7679.pdf, ComponentLink3Description="AT90CAN32/64/128 Summary", ComponentLink3URL=http://www.atmel.com/dyn/resources/prod_documents/7679S.pdf, DatasheetVersion="revH, Aug-2008", PackageDescription="64-Pin Plastic Thin Profile Quad Flat Pack, 14 x 14 x 1.0 mm Body, 0.8 mm Pitch (TQFP)", PackageReference=64A, PackageVersion="revC, Oct-2010", RevisionNote="PackageVersion updated. URLs added."
U2: library part CMP-0078-00029-3, "USB UART Asynchronous Serial Data Transfer Chip, 28-pin SSOP, Tape and Reel", Manufacturer=FTDI, ComponentLink1Description="Manufacturer URL", ComponentLink1URL=http://www.ftdichip.com/, ComponentLink2Description=Datasheet, ComponentLink2URL=http://www.ftdichip.com/Support/Documents/DataSheets/ICs/DS_FT232R.pdf, DatasheetVersion="ver 2.10, Mar-2012", PackageDescription="28-Pin Small Outline Package 0.65 mm Pitch", PackageReference=SSOP-28, PackageVersion=Mar-12, PartNumber=FT232RL-Reel, RevisionNote="DatasheetVersion updated to 2.10 Mar-2012"
U3: library part CMP-2000-07464-1, "Ultra-Low-Noise, Low-IQ LDO, 0.25 A, Fixed 3.3 V Output, 2.2 to 5.5 V Input, -40 to 125 degC, 5-Pin SOT-23 (DBV), Green (RoHS & no Sb/Br), Tape and Reel", Case\/Package=SOT-23, Dropout Voltage=250mV, Manufacturer="Texas Instruments", Max Input Voltage=5.5V, Max Operating Temperature=125degC, Max Output Current=250mA, Min Input Voltage=2.2V, Min Operating Temperature=-40degC, Nominal Output Voltage=3.3V, Output Voltage Accuracy=2%, Package Description="5-Pin Small Outline Transistor, Body 2.9 x 1.6 mm, Pitch 0.95 mm", Package Quantity=3000, Package Reference=DBV5, Package Version="4073253-4/N, 12/2014", Power Supply Rejection Ratio (PSRR)=82dB, Quiescent Current=425uA, Accuracy=2%, Contact Plating=Tin, Datasheet URL=http://www.ti.com/lit/ds/symlink/lp5907.pdf, Datasheet Version="Rev. L, 09/2016", Lead Free=LeadFree, Manufacturer URL=http://www.ti.com/, Mount=SurfaceMount, Mounting Technology=SurfaceMount, Number of Outputs=1, Number of Pins=5, Number of Regulators=1, Output Current=250mA, Output Voltage=3.3V, Package URL=http://www.ti.com/lit/ml/mpds018l/mpds018l.pdf, Packaging=TapeandReel, Polarity=Positive, Radiation Hardening=No, REACH SVHC=NoSVHC, RoHSCompliant=true
U4: library part CMP-0062-01628-3, "800mA Low-Dropout Linear Regulator, 4-pin SOT-223, Pb-Free", Manufacturer="National Semiconductor", PackageTopMarking=XYTT*N06B, PowerWise=N, Code_IPC=SOT223-4, Code_JEDEC=TO-261-AA, ComponentLink1Description="Manufacturer URL", ComponentLink1URL=http://www.national.com/, ComponentLink2Description="LM1117 Datasheet", ComponentLink2URL=http://www.national.com/ds/LM/LM1117.pdf, ComponentLink3Description="LM1117 Web Page", ComponentLink3URL=http://www.national.com/pf/LM/LM1117.html, ComponentLink4Description="MP04A Package Page", ComponentLink4URL=http://www.national.com/packaging/folders/mp04a.html, CompType="LDO IC", DatasheetVersion=Apr-2006, High-Reliability=Y, PackageDescription="Molded SOT-223, 6.50 x 3.56 x 1.6mm Body, 4 Lead, 2.3mm Pitch", PackageReference=MP04A, PackageVersion="revB, Apr-2003", PartNumber=LM1117IMPX-5.0/NOPB, PinCount=4, RevisionNote="SCH symbol layout adjusted", RoHS=Y
U5: library part CMP-0186-00138-2, "High-Speed CAN Transceiver, 8-Pin SOIC, Industrial Temperature", Code_IPC=SOIC127P600-8, Code_JEDEC=MS-012, ComponentLink1Description="Manufacturer URL", ComponentLink1URL=http://www.microchip.com/, ComponentLink2Description=Datasheet, ComponentLink2URL=http://ww1.microchip.com/downloads/en/DeviceDoc/21667F.pdf, ComponentLink3Description="Package Specification", ComponentLink3URL=http://www.microchip.com/stellent/groups/techpub_sg/documents/packagingspec/en012702.pdf, DatasheetVersion="revF, Jul-2010", PackageDescription="8-Lead Plastic Small Outline (SN) - Narrow, 3.90mm Body [SOIC]", PackageReference=SOIC-SN8, PackageVersion="revBB, Aug-2009", RevisionNote="URLs added. DatasheetVersion updated."
U6: library part CMP-0069-01337-3, "High Voltage Switch Mode Regulator, 16-pin TSSOP, Pb-Free", Manufacturer="Texas Instruments", PackageTopMarking=NSZXYTT*LM5000*3MTC, PowerWise=N, Code_JEDEC=MO-153-AB, ComponentLink1Description="Datasheet URL", ComponentLink1URL=http://www.ti.com/general/docs/lit/getliterature.tsp?genericPartNumber=LM5000&fileType=pdf, CompType=Switcher, PackageDescription="Molded TSSOP, Jedec, 5 x 4.4 x 0.9mm Body, 16 Lead, 0.65mm Pitch", PackageReference=PW0016A, PinCount=16, RoHS=Y
U7: "Low Voltage Quad Buffer with 5V tolerant Inputs and Outputs", ComponentLink1Description="Digikey Link", ComponentLink1URL=https://www.digikey.com/product-detail/en/on-semiconductor/74LCX125MX/74LCX125MXCT-ND/965496
Y1: "Crystal Oscillator", LatestRevisionDate=17-Jul-2002, LatestRevisionNote="Re-released for DXP Platform.", PackageDescription="Crystal, Thru-Hole; 2 Leads; Body 3.1 x 8.2 mm (Dia.xH)", PackageReference=R38, Published=8-Jun-2000, Publisher="Altium Limited"
L2: Code_IEC=1005, Code_JEITA=0402, LatestRevisionDate=29-May-2009, LatestRevisionNote="IPC-7351 Footprint Added.", PackageDescription="Chip Inductor", PackageReference=0402-A, Published=8-Jun-2000, Publisher="Altium Limited"

## Nets (pads, with @x,y where several pads share a name; then routed paths per layer and width w, separated by ;. In a path a pad name is that pad's centre, name@x,y a point inside that pad or via, vN(x,y) a via of type N, cw(c..) or ccw(c..) an arc to the next point about the centre after c; other vN are vias at no path point)
3.3V: C5.1 C22.1 J1.37 R13.2 U1.9@3729.72,2990.52 U1.16@3601.66,2990.52 U1.18@3573.82,2962.68 U3.5
+12: C4.1 C10.2 C11.2 C12.2 C13.2 D1.1 L2.1 Q1_HD1.2 Q1_HD2.2 Q1_HD3.2 R9.2 U3.1 U3.3 X1.6 X2.1
AVR_MISO: U1.13@2484.71,2773.18 U7.5
AVR_MOSI: U1.12@2516.2,2773.18 U7.12
AVR_S\S\: U1.10@2579.2,2773.18 U7.2
AVR_SCLK: U1.11@2547.7,2773.18 U7.9
B2: J1.18 U1.35@3629.5,2695.42
B3: J1.17 U1.34@3615.58,2709.34
B4: J1.16 U1.33@3601.66,2723.26
B5: J1.15 U1.32@3587.74,2737.18
B6: J1.14 U1.31@3573.82,2751.1
B7: J1.13 U1.30@3559.9,2765.02
CAN0.CAN_N: D2.2 U5.6 X1.5
CAN0.CAN_P: D2.1 U5.7 X1.4
CAN1_N: X1.10 X2.4
CAN1_P: X1.9 X2.3
D_EN: J1.7 U1.25@3490.3,2834.62
DCLK: J1.11 U1.29@3545.98,2778.94
DISP_EN: J1.10 U1.28@3532.06,2792.86
DOWN_SH: X1.8 X3.3
DRV1: F1_HD1.1 X4.2
DRV2: F1_HD2.1 X4.3
DRV3: F1_HD3.1 X4.4
G2: J1.26 U1.42@3757.56,2751.1
G3: J1.25 U1.41@3743.64,2737.18
G4: J1.24 U1.40@3729.72,2723.26
G5: J1.23 U1.39@3715.8,2709.34
G6: J1.22 U1.38@3701.88,2695.42
G7: J1.21 U1.37@3687.96,2681.5
GND: C1.1 C2.1 C4.2 C5.2 C6.2 C7.2 C8.1 C9.1 C10.1 C11.1 C12.1 C13.1 C14.1 C15.1 C16.1 C17.1 C18.1 C19.1 C20.1 C21.1 C22.2 C23.1 C24.1 D2.3 J1.5 J1.6 J1.12 J1.19 J1.20 J1.27 J1.28 J1.35 J1.36 J1.38 J1.40 J1.MP1 J1.MP2 JP1.2 LED1.2 Q2_HD1.2 Q2_HD2.2 Q2_HD3.2 R6.1 R11.1 R25_ROT1.2 R25_ROT2.2 R25_ROT3.2 S1_ROT1.12 S1_ROT2.12 S1_ROT3.12 U1.2@3827.15,2893.08 U1.10@3715.8,3004.43 U1.13@3643.42,3032.27 U1.15@3615.58,3004.43 U1.22@2323.29,2548.77 U1.23@3504.22,2893.08 U1.36@3643.42,2681.5 U1.49@3665.69,2856.89 U1.53 U1.63 U2.7 U2.18 U2.21 U2.25 U2.26 U3.2 U4.1 U4.4 U5.2 U6.4 U6.5 U6.6 U6.7 U6.8 U6.15 U6.16 U7.1 U7.4 U7.7 U7.10 U7.13 X1.1 X2.2 X3.1 X4.1
HSYNC: J1.9 U1.27@3518.14,2806.78
MISO: U1.4@3799.31,2920.92 U7.6
MOSI: U1.5@3785.39,2934.84 U7.11
NetC2_2: C2.2 U2.17
NetC3_2: C3.2 U2.2
NetC7_1: C7.1 D1.2 U4.3
NetC8_2: C8.2 U1.24@2323.29,2485.78 Y1.1
NetC9_2: C9.2 U1.23@2323.29,2517.28 Y1.2
NetC14_2: C14.2 R9.1 U6.13
NetC15_2: C15.2 U6.12
NetC16_2: C16.2 U6.14
NetC17_2: C17.2 C18.2 J1.39 R10.1 R11.2 U6.2
NetC19_2: C19.2 R12.2 U6.1
NetC20_2: C20.2 R12.1
NetC21_2: C21.2 U1.17@3587.74,2976.6
NetC23_2: C23.2 R13.1 U1.12@3687.96,3032.27
NetD3_1: D3.1 R10.2
NetD3_2: D3.2 L2.2 U6.9 U6.10 U6.11
NetF1_HD1_2: F1_HD1.2 Q1_HD1.3
NetF1_HD2_2: F1_HD2.2 Q1_HD2.3
NetF1_HD3_2: F1_HD3.2 Q1_HD3.3
NetL1_1: L1.1 U1.64
NetLED1_1: LED1.1 R5.1
NetLED2_1: LED2.1 R7.1
NetLED2_2: LED2.2 U2.23
NetLED3_1: LED3.1 R8.1
NetLED3_2: LED3.2 U2.22
NetQ1_HD1_1: Q1_HD1.1 R1_HD1.2
NetQ1_HD2_1: Q1_HD2.1 R1_HD2.2
NetQ1_HD3_1: Q1_HD3.1 R1_HD3.2
NetQ2_HD1_1: Q2_HD1.1 R2_HD1.2
NetQ2_HD1_3: Q2_HD1.3 R1_HD1.1
NetQ2_HD2_1: Q2_HD2.1 R2_HD2.2
NetQ2_HD2_3: Q2_HD2.3 R1_HD2.1
NetQ2_HD3_1: Q2_HD3.1 R2_HD3.2
NetQ2_HD3_3: Q2_HD3.3 R1_HD3.1
NetR3_1: R3.1 U2.1
NetR3_2: R3.2 U1.2@2831.16,2773.18
NetR4_1: R4.1 U2.5
NetR4_2: R4.2 U1.3@2799.67,2773.18
NetR6_2: R6.2 U5.8
NetR15_ROT1_2: R15_ROT1.2 R16_ROT1.2 S1_ROT1.2 | length 296.8
  Top Layer w8: S1_ROT1.2 1338.82,153.31 1383.86,108.27 R16_ROT1.2 R15_ROT1.2
NetR15_ROT2_2: R15_ROT2.2 R16_ROT2.2 S1_ROT2.2 | length 296.8
  Top Layer w8: S1_ROT2.2@2687.44,153.11 2837.84,153.11 2882.87,108.07 R16_ROT2.2 R15_ROT2.2
NetR15_ROT3_2: R15_ROT3.2 R16_ROT3.2 S1_ROT3.2 | length 296.8
  Top Layer w8: S1_ROT3.2@4187.44,153.11 4337.84,153.11 4382.87,108.07 R16_ROT3.2 R15_ROT3.2
NetR16_ROT1_1: R16_ROT1.1 R17_ROT1.1 S1_ROT1.3 | length 784.3
  Top Layer w8: R17_ROT1.1 663.39,108.27 703.75,67.91 1068.42,67.91 S1_ROT1.3 1327.17,105.91 1383.86,49.21 R16_ROT1.1
NetR16_ROT2_1: R16_ROT2.1 R17_ROT2.1 S1_ROT2.3 | length 784.3
  Top Layer w8: R17_ROT2.1 2162.4,108.07 2202.76,67.71 2567.43,67.71 2605.43,105.71 2826.18,105.71 2882.87,49.02 R16_ROT2.1
NetR16_ROT3_1: R16_ROT3.1 R17_ROT3.1 S1_ROT3.3 | length 784.3
  Top Layer w8: R17_ROT3.1 3662.4,108.07 3702.76,67.71 4067.43,67.71 4105.43,105.71 4326.18,105.71 4382.87,49.02 R16_ROT3.1
NetR17_ROT1_2: R17_ROT1.2 R18_ROT1.2 S1_ROT1.4 | length 520.3
  Top Layer w8: R18_ROT1.2 551.12,216.6 606.24,216.6 655.51,167.32 663.39,167.32 724.8,105.91 S1_ROT1.4
NetR17_ROT2_2: R17_ROT2.2 R18_ROT2.2 S1_ROT2.4 | length 520.3
  Top Layer w8: R18_ROT2.2 2050.13,216.4 2105.25,216.4 2154.53,167.13 2162.4,167.13 2223.82,105.71 S1_ROT2.4@2510.71,105.71
NetR17_ROT3_2: R17_ROT3.2 R18_ROT3.2 S1_ROT3.4 | length 520.3
  Top Layer w8: R18_ROT3.2 3550.13,216.4 3605.25,216.4 3654.53,167.13 3662.4,167.13 3723.82,105.71 S1_ROT3.4@4010.71,105.71
NetR18_ROT1_1: R18_ROT1.1 R19_ROT1.1 S1_ROT1.5 | length 475.7
  Top Layer w8: R18_ROT1.1 545.28,285.43 574.87,315.02 669.35,315.02 R19_ROT1.1 683.07,324.8 854.57,153.31 S1_ROT1.5
NetR18_ROT2_1: R18_ROT2.1 R19_ROT2.1 S1_ROT2.5 | length 475.7
  Top Layer w8: R18_ROT2.1 2044.29,285.24 2073.88,314.83 2168.37,314.83 R19_ROT2.1 2182.09,324.61 2353.58,153.11 S1_ROT2.5@2428.7,153.11
NetR18_ROT3_1: R18_ROT3.1 R19_ROT3.1 S1_ROT3.5 | length 475.7
  Top Layer w8: R18_ROT3.1 3544.29,285.24 3573.88,314.83 3668.37,314.83 R19_ROT3.1 3682.09,324.61 3853.58,153.11 S1_ROT3.5@3928.7,153.11
NetR19_ROT1_2: R19_ROT1.2 R20_ROT1.2 S1_ROT1.6 | length 448.3
  Top Layer w8: R20_ROT1.2 521.59,413.45 645.61,413.45 675.2,383.86 R19_ROT1.2 688.91,374.08 743.52,374.08 S1_ROT1.6
NetR19_ROT2_2: R19_ROT2.2 R20_ROT2.2 S1_ROT2.6 | length 448.3
  Top Layer w8: R20_ROT2.2 2020.61,413.25 2144.62,413.25 2174.21,383.66 R19_ROT2.2 2187.93,373.88 2242.54,373.88 S1_ROT2.6@2381.3,235.12
NetR19_ROT3_2: R19_ROT3.2 R20_ROT3.2 S1_ROT3.6 | length 448.3
  Top Layer w8: R20_ROT3.2 3520.61,413.25 3644.62,413.25 3674.21,383.66 R19_ROT3.2 3687.93,373.88 3742.54,373.88 S1_ROT3.6@3881.3,235.12
NetR20_ROT1_1: R20_ROT1.1 R21_ROT1.1 S1_ROT1.7 | length 465.1
  Top Layer w8: R20_ROT1.1 521.59,492.06 684.98,492.06 704.72,511.81 712.6,511.81 882.32,342.09 S1_ROT1.7
NetR20_ROT2_1: R20_ROT2.1 R21_ROT2.1 S1_ROT2.7 | length 465.1
  Top Layer w8: R20_ROT2.1 2020.61,491.87 2183.99,491.87 2203.74,511.61 2211.61,511.61 2381.34,341.89 S1_ROT2.7@2381.34,329.84
NetR20_ROT3_1: R20_ROT3.1 R21_ROT3.1 S1_ROT3.7 | length 465.1
  Top Layer w8: R20_ROT3.1 3520.61,491.87 3683.99,491.87 3703.74,511.61 3711.61,511.61 3881.34,341.89 S1_ROT3.7@3881.34,329.84
NetR21_ROT1_2: R21_ROT1.2 R22_ROT1.2 S1_ROT1.8 | length 436.6
  Top Layer w8: R21_ROT1.2 712.6,570.87 767.78,626.05 846.52,626.05 856.3,635.83 R22_ROT1.2 866.08,629.98 866.08,475.65 S1_ROT1.8
NetR21_ROT2_2: R21_ROT2.2 R22_ROT2.2 S1_ROT2.8 | length 436.6
  Top Layer w8: R21_ROT2.2 2211.61,570.67 2266.8,625.85 2345.54,625.85 2355.32,635.63 R22_ROT2.2 2365.09,629.79 2365.09,475.46 S1_ROT2.8@2428.7,411.85
NetR21_ROT3_2: R21_ROT3.2 R22_ROT3.2 S1_ROT3.8 | length 436.6
  Top Layer w8: R21_ROT3.2 3711.61,570.67 3766.8,625.85 3845.54,625.85 3855.32,635.63 R22_ROT3.2 3865.09,629.79 3865.09,475.46 S1_ROT3.8@3928.7,411.85
NetR22_ROT1_1: R22_ROT1.1 R23_ROT1.1 S1_ROT1.9 | length 307.5
  Top Layer w8: R22_ROT1.1 R23_ROT1.1 1033.46,635.83 1011.69,614.06 S1_ROT1.9
NetR22_ROT2_1: R22_ROT2.1 R23_ROT2.1 S1_ROT2.9 | length 307.5
  Top Layer w8: R22_ROT2.1 R23_ROT2.1 2532.48,635.63 2510.71,613.86 S1_ROT2.9@2510.71,459.21
NetR22_ROT3_1: R22_ROT3.1 R23_ROT3.1 S1_ROT3.9 | length 307.5
  Top Layer w8: R22_ROT3.1 R23_ROT3.1 4032.48,635.63 4010.71,613.86 S1_ROT3.9@4010.71,459.21
NetR23_ROT1_2: R23_ROT1.2 R24_ROT1.2 S1_ROT1.10 | length 294.4
  Top Layer w8: S1_ROT1.10 1102.3,463.53 1102.3,629.98 R23_ROT1.2 R24_ROT1.2
NetR23_ROT2_2: R23_ROT2.2 R24_ROT2.2 S1_ROT2.10 | length 294.4
  Top Layer w8: S1_ROT2.10@2605.43,459.21 2601.32,463.33 2601.32,629.79 R23_ROT2.2 R24_ROT2.2
NetR23_ROT3_2: R23_ROT3.2 R24_ROT3.2 S1_ROT3.10 | length 294.4
  Top Layer w8: S1_ROT3.10@4105.43,459.21 4101.32,463.33 4101.32,629.79 R23_ROT3.2 R24_ROT3.2
NetR24_ROT1_1: R24_ROT1.1 R25_ROT1.1 S1_ROT1.11 | length 410
  Top Layer w8: S1_ROT1.11 1278.41,502.03 1368.17,502.03 R25_ROT1.1 1374.02,511.81 1364.24,521.59 1364.24,531.43 1259.84,635.83 R24_ROT1.1
NetR24_ROT2_1: R24_ROT2.1 R25_ROT2.1 S1_ROT2.11 | length 410
  Top Layer w8: S1_ROT2.11@2687.44,411.85 2777.43,501.83 2867.19,501.83 R25_ROT2.1 2873.03,511.61 2863.25,521.39 2863.25,531.24 2758.86,635.63 R24_ROT2.1
NetR24_ROT3_1: R24_ROT3.1 R25_ROT3.1 S1_ROT3.11 | length 410
  Top Layer w8: S1_ROT3.11@4187.44,411.85 4277.43,501.83 4367.19,501.83 R25_ROT3.1 4373.03,511.61 4363.25,521.39 4363.25,531.24 4258.86,635.63 R24_ROT3.1
NetU1_4: U1.4@2768.17,2773.18
NetU1_5: U1.5@2736.68,2773.18
NetU1_6: U1.6@2705.18,2773.18
NetU1_7: U1.7@2673.68,2773.18
NetU1_8: U1.8@2642.19,2773.18
NetU1_9: U1.9@2610.69,2773.18
NetU1_17: U1.17@2323.29,2706.25
NetU1_18: U1.18@2323.29,2674.76
NetU1_19: U1.19@2323.29,2643.26
NetU1_25: U1.25@2323.29,2454.28
NetU1_26: U1.26@2323.29,2422.79
NetU1_27: U1.27@2323.29,2391.29
NetU1_28: U1.28@2323.29,2359.8
NetU1_29: U1.29@2323.29,2328.3
NetU1_32: U1.32@2323.29,2233.81
NetU1_33: U1.33@2390.22,2166.88
NetU1_34: U1.34@2421.72,2166.88
NetU1_35: U1.35@2453.21,2166.88
NetU1_36: U1.36@2484.71,2166.88
NetU1_37: U1.37@2516.2,2166.88
NetU1_38: U1.38@2547.7,2166.88
NetU1_39: U1.39@2579.2,2166.88
NetU1_40: U1.40@2610.69,2166.88
NetU1_41: U1.41@2642.19,2166.88
NetU1_42: U1.42@2673.68,2166.88
NetU1_43: U1.43@2705.18,2166.88
NetU1_44: U1.44@2736.68,2166.88
NetU1_45: U1.45@2768.17,2166.88
NetU1_46: U1.46@2799.67,2166.88
NetU1_47: U1.47@2831.16,2166.88
NetU1_48: U1.48@2862.66,2166.88
NetU1_49: U1.49@2929.59,2233.81
NetU1_50: U1.50
NetU1_51: U1.51
NetU1_54: U1.54
NetU1_55: U1.55
NetU1_56: U1.56
NetU1_57: U1.57
NetU1_58: U1.58
NetU1_62: U1.62
NetU2_15: U2.15
NetU2_16: U2.16
POS1: S1_ROT1.13 U1.59
POS2: S1_ROT2.13 U1.60
POS3: S1_ROT3.13 U1.61
PWM1: R2_HD1.1 U1.16@2390.22,2773.18
PWM2: R2_HD2.1 U1.15@2421.72,2773.18
PWM3: R2_HD3.1 U1.14@2453.21,2773.18
R2: J1.34 U1.48@3841.07,2834.62
R3: J1.33 U1.47@3827.15,2820.7
R4: J1.32 U1.46@3813.23,2806.78
R5: J1.31 U1.45@3799.31,2792.86
R6: J1.30 U1.44@3785.39,2778.94
R7: J1.29 U1.43@3771.47,2765.02
Reset: C3.1 C24.2 D4.1 JP1.1 R14.1 U1.20@2323.29,2611.76
RXCAN: U1.31@2323.29,2265.31 U5.4
S\S\: U1.6@3771.47,2948.76 U7.3
SCLK: U1.3@3813.23,2907 U7.8
TXCAN: U1.30@2323.29,2296.8 U5.1
UP_SH: X1.7 X3.2
VCC: C1.2 C6.1 D4.2 L1.2 R5.2 R7.2 R8.2 R14.2 R15_ROT1.1 R15_ROT2.1 R15_ROT3.1 S1_ROT1.1 S1_ROT2.1 S1_ROT3.1 U1.21@2323.29,2580.27 U1.52 U2.4 U2.19 U2.20 U4.2 U5.3 U7.14
VSYNC: J1.8 U1.26@3504.22,2820.7
pads on no net: J1.1 J1.2 J1.3 J1.4 U1.1 U1.7@3757.56,2962.68 U1.8@3743.64,2976.6 U1.11@3701.88,3018.35 U1.14@3629.5,3018.35 U1.19@3559.9,2948.76 U1.20@3545.98,2934.84 U1.21@3532.06,2920.92 U1.22@3518.14,2907 U1.24@3490.3,2879.16 U2.3 U2.6 U2.8 U2.9 U2.10 U2.11 U2.12 U2.13 U2.14 U2.24 U2.27 U2.28 U3.4 U5.5 U6.3 X1.2 X1.3 X1.11 X1.12 X2.H1 X2.H2 X3.4 X3.H1 X3.H2 X4.H1 X4.H2